# EAGLE board DAC breakout MULT (EAGLE 7.5.0)
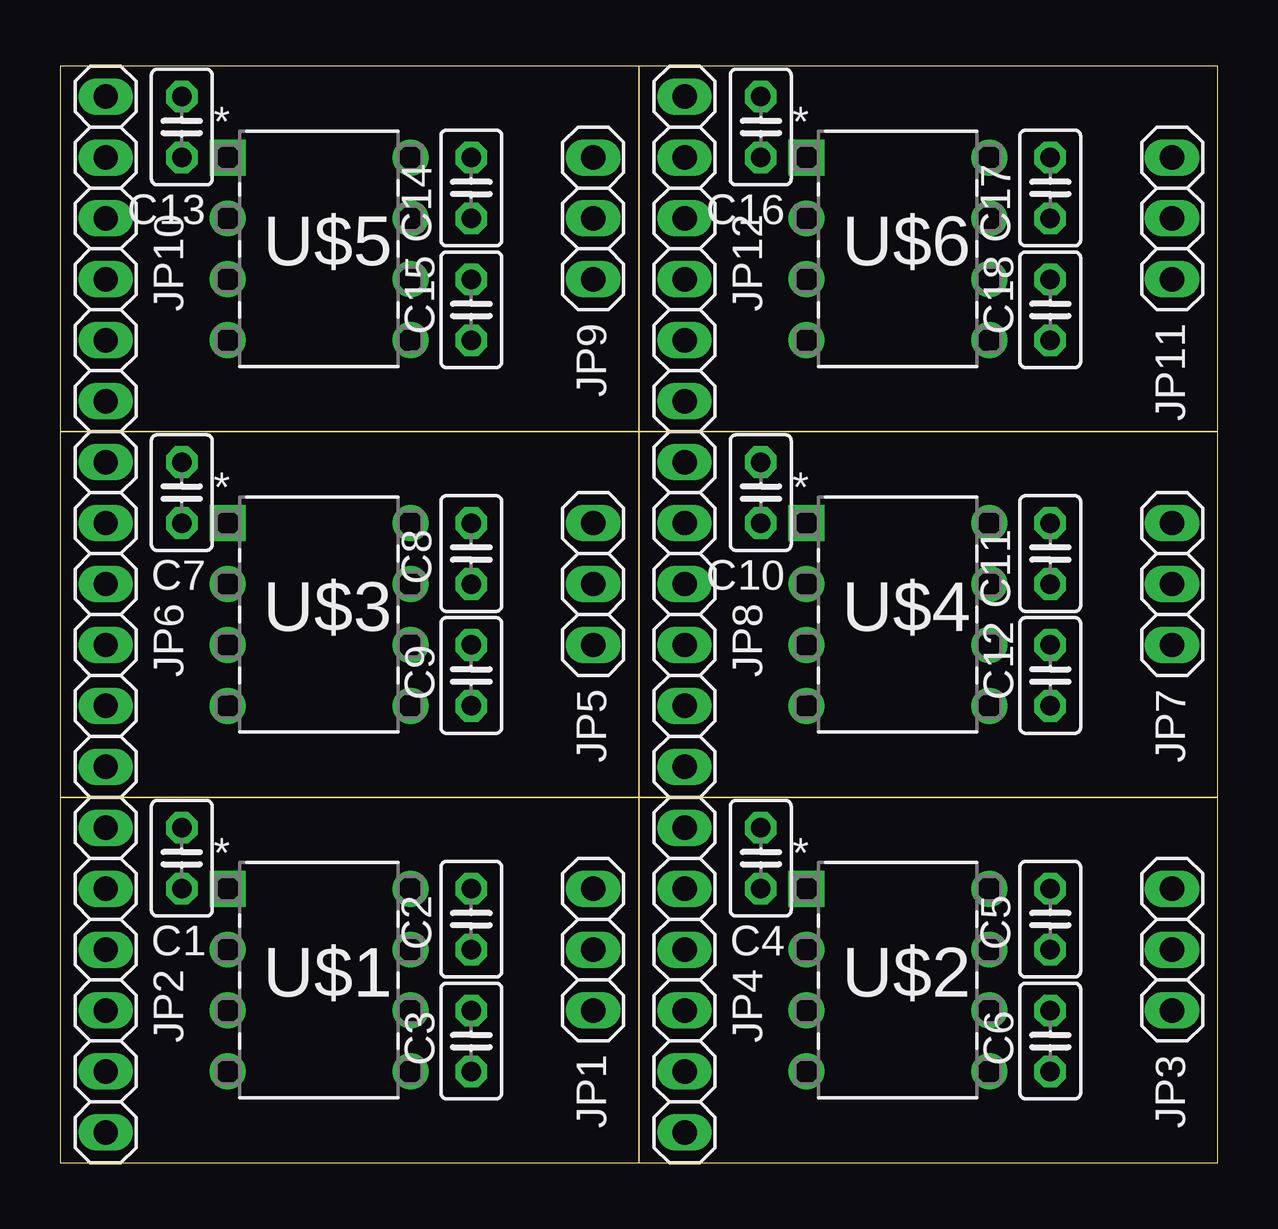
[diagram p0: board, top side]
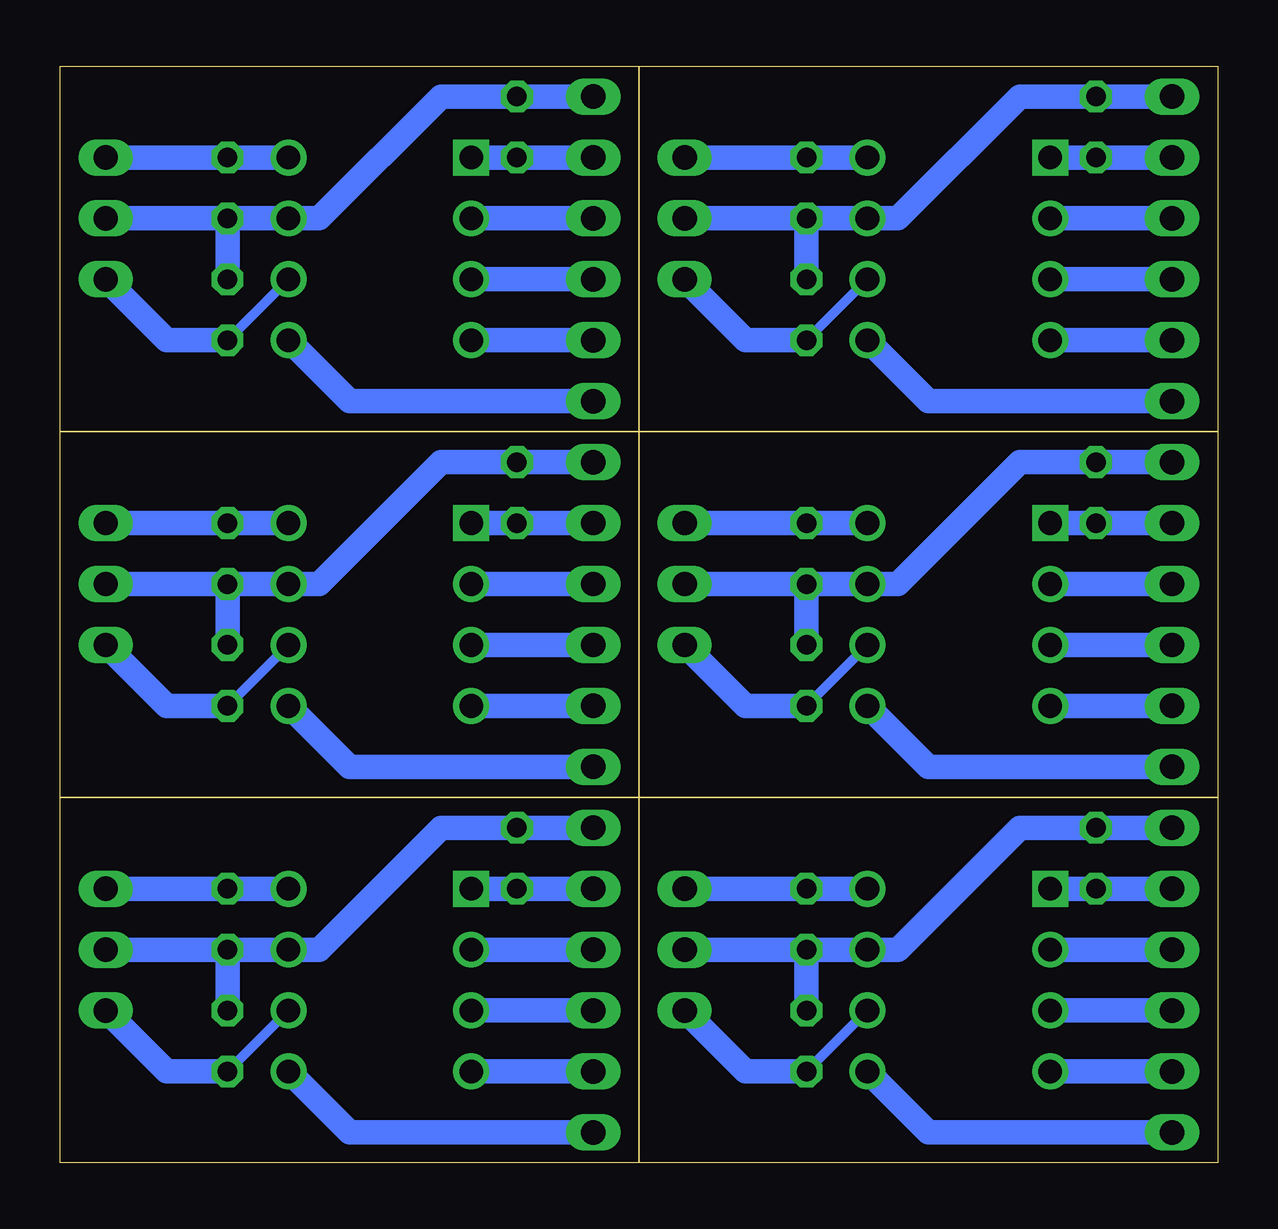
[diagram p1: board, bottom side, seen from below]

Size 48.26 x 45.72 mm. Coordinates in mm from the lower left corner, seen from the top.
Outline: 24.13,0 0,0 0,15.24
Outline: 24.13,0 24.13,15.24
Outline: 24.13,15.24 0,15.24
Outline: 24.13,0 48.26,0 48.26,15.24
Outline: 48.26,15.24 24.13,15.24
Outline: 24.13,15.24 24.13,0
Outline: 0,15.24 24.13,15.24
Outline: 24.13,15.24 24.13,30.48
Outline: 24.13,30.48 0,30.48
Outline: 0,30.48 0,15.24
Outline: 24.13,15.24 48.26,15.24
Outline: 48.26,15.24 48.26,30.48
Outline: 48.26,30.48 24.13,30.48
Outline: 24.13,30.48 24.13,15.24
Outline: 0,30.48 24.13,30.48
Outline: 24.13,30.48 24.13,45.72
Outline: 24.13,45.72 0,45.72 0,30.48
Outline: 24.13,30.48 48.26,30.48
Outline: 48.26,30.48 48.26,45.72 24.13,45.72
Outline: 24.13,45.72 24.13,30.48
Copper layers (1*16): Top 0.035mm / dielectric 1.5mm / Bottom 0.035mm
Design rules "Othermill-DRC-1-32": minimum track width 8mil, minimum drill 0.8mm, track to track 0.794003125mm, track to pad 0.794003125mm, pad to pad 0.794003125mm, via to via 0.794003125mm, smd to smd 0mil, copper to edge 0mil, drill to drill 1mil, minimum pad ring 10mil, minimum via ring 10mil, stop-mask expansion 1mil, vias tented up to drill 30mil, thermal gap 10mil

## Footprints (pad centres in the part's own frame; a part is rotated, then mirrored left to right if it is on the bottom)
C025-025X050 = drill 0.813 octagon: 1 -1.27,0; 2 1.27,0
1X03 = drill 1.016 long: 1 -2.54,0; 2 0,0; 3 2.54,0
1X06 = drill 1.016 long: 1 -6.35,0; 2 -3.81,0; 3 -1.27,0; 4 1.27,0; 5 3.81,0; 6 6.35,0
DIP254P762X432-8 = drill 0.991 square: 1 -7.62,7.62 | drill 0.991: 2 -7.62,5.08; 3 -7.62,2.54; 4 -7.62,0; 5 0,0; 6 0,2.54; 7 0,5.08; 8 0,7.62

## Placement (x,y rotation side)
C1  0.1uF  [C025-025X050]  5.08,12.7 90 top
C2  1uF  [C025-025X050]  17.14,10.16 270 top
C3  1uF  [C025-025X050]  17.14,5.08 90 top
C4  0.1uF  [C025-025X050]  29.21,12.7 90 top
C5  1uF  [C025-025X050]  41.27,10.16 270 top
C6  1uF  [C025-025X050]  41.27,5.08 90 top
C7  0.1uF  [C025-025X050]  5.08,27.94 90 top
C8  1uF  [C025-025X050]  17.14,25.4 270 top
C9  1uF  [C025-025X050]  17.14,20.32 90 top
C10  0.1uF  [C025-025X050]  29.21,27.94 90 top
C11  1uF  [C025-025X050]  41.27,25.4 270 top
C12  1uF  [C025-025X050]  41.27,20.32 90 top
C13  0.1uF  [C025-025X050]  5.08,43.18 90 top
C14  1uF  [C025-025X050]  17.14,40.64 270 top
C15  1uF  [C025-025X050]  17.14,35.56 90 top
C16  0.1uF  [C025-025X050]  29.21,43.18 90 top
C17  1uF  [C025-025X050]  41.27,40.64 270 top
C18  1uF  [C025-025X050]  41.27,35.56 90 top
JP1  [1X03]  22.22,8.89 270 top
JP2  [1X06]  1.91,7.62 90 top
JP3  [1X03]  46.36,8.89 270 top
JP4  [1X06]  26.04,7.62 90 top
JP5  [1X03]  22.22,24.13 270 top
JP6  [1X06]  1.91,22.86 90 top
JP7  [1X03]  46.36,24.13 270 top
JP8  [1X06]  26.04,22.86 90 top
JP9  [1X03]  22.22,39.37 270 top
JP10  [1X06]  1.91,38.1 90 top
JP11  [1X03]  46.36,39.37 270 top
JP12  [1X06]  26.04,38.1 90 top
U$1  MCP4822-E/P  [DIP254P762X432-8]  14.61,3.81 0 top
U$2  MCP4822-E/P  [DIP254P762X432-8]  38.73,3.81 0 top
U$3  MCP4822-E/P  [DIP254P762X432-8]  14.61,19.05 0 top
U$4  MCP4822-E/P  [DIP254P762X432-8]  38.73,19.05 0 top
U$5  MCP4822-E/P  [DIP254P762X432-8]  14.61,34.29 0 top
U$6  MCP4822-E/P  [DIP254P762X432-8]  38.73,34.29 0 top

## Library data of the parts
C1-C18 = rcl
JP1-JP12 = pinhead
U$1-U$6 = Microchip_By_element14_Batch_1; MPN: MCP4822-E/P; OC_FARNELL: 1439413; OC_NEWARK: 11M1705; PACKAGE: DIP-8; SUPPLIER: Microchip

## Nets
GND: C1.2 C2.2 C3.2 JP1.2 JP2.6 U$1.7
GND1: C4.2 C5.2 C6.2 JP3.2 JP4.6 U$2.7
GND2: C7.2 C8.2 C9.2 JP5.2 JP6.6 U$3.7
GND3: C10.2 C11.2 C12.2 JP7.2 JP8.6 U$4.7
GND4: C13.2 C14.2 C15.2 JP9.2 JP10.6 U$5.7
GND5: C16.2 C17.2 C18.2 JP11.2 JP12.6 U$6.7
N$1: C1.1 JP2.5 U$1.1
N$2: C2.1 JP1.1 U$1.8
N$3: C3.1 JP1.3 U$1.6
N$4: JP2.4 U$1.2
N$5: JP2.3 U$1.3
N$6: JP2.2 U$1.4
N$7: JP2.1 U$1.5
N$8: C4.1 JP4.5 U$2.1
N$9: JP4.4 U$2.2
N$10: JP4.3 U$2.3
N$11: JP4.2 U$2.4
N$12: JP4.1 U$2.5
N$13: C5.1 JP3.1 U$2.8
N$14: C6.1 JP3.3 U$2.6
N$15: C7.1 JP6.5 U$3.1
N$16: JP6.4 U$3.2
N$17: JP6.3 U$3.3
N$18: JP6.2 U$3.4
N$19: JP6.1 U$3.5
N$20: C8.1 JP5.1 U$3.8
N$21: C9.1 JP5.3 U$3.6
N$22: C10.1 JP8.5 U$4.1
N$23: JP8.4 U$4.2
N$24: JP8.3 U$4.3
N$25: JP8.2 U$4.4
N$26: JP8.1 U$4.5
N$27: C11.1 JP7.1 U$4.8
N$28: C12.1 JP7.3 U$4.6
N$29: C13.1 JP10.5 U$5.1
N$30: JP10.4 U$5.2
N$31: JP10.3 U$5.3
N$32: JP10.2 U$5.4
N$33: JP10.1 U$5.5
N$34: C14.1 JP9.1 U$5.8
N$35: C15.1 JP9.3 U$5.6
N$36: C16.1 JP12.5 U$6.1
N$37: JP12.4 U$6.2
N$38: JP12.3 U$6.3
N$39: JP12.2 U$6.4
N$40: JP12.1 U$6.5
N$41: C17.1 JP11.1 U$6.8
N$42: C18.1 JP11.3 U$6.6

## Tracks (layer width: path | path; a pad name or v marks a point on that pad's centre or on a via)
GND
  Bottom 1.016: JP2.6 C1.2 8.26,13.97 13.34,8.89 U$1.7 C2.2 | C2.2 C3.2 | JP1.2 C2.2
GND1
  Bottom 1.016: JP4.6 C4.2 32.39,13.97 37.47,8.89 U$2.7 C5.2 | C5.2 C6.2 | JP3.2 C5.2
GND2
  Bottom 1.016: JP6.6 C7.2 8.26,29.21 13.34,24.13 U$3.7 C8.2 | C8.2 C9.2 | JP5.2 C8.2
GND3
  Bottom 1.016: JP8.6 C10.2 32.39,29.21 37.47,24.13 U$4.7 C11.2 | C11.2 C12.2 | JP7.2 C11.2
GND4
  Bottom 1.016: JP10.6 C13.2 8.26,44.45 13.34,39.37 U$5.7 C14.2 | C14.2 C15.2 | JP9.2 C14.2
GND5
  Bottom 1.016: JP12.6 C16.2 32.39,44.45 37.47,39.37 U$6.7 C17.2 | C17.2 C18.2 | JP11.2 C17.2
N$1
  Bottom 1.016: JP2.5 C1.1 U$1.1
N$2
  Bottom 1.016: U$1.8 C2.1 JP1.1
N$3
  Bottom 0.406: C3.1 U$1.6
  Bottom 1.016: JP1.3 19.68,3.81 C3.1
N$4
  Bottom 1.016: JP2.4 U$1.2
N$5
  Bottom 1.016: JP2.3 U$1.3
N$6
  Bottom 1.016: JP2.2 U$1.4
N$7
  Bottom 1.016: JP2.1 12.06,1.27 U$1.5
N$8
  Bottom 1.016: JP4.5 C4.1 U$2.1
N$9
  Bottom 1.016: JP4.4 U$2.2
N$10
  Bottom 1.016: JP4.3 U$2.3
N$11
  Bottom 1.016: JP4.2 U$2.4
N$12
  Bottom 1.016: JP4.1 36.2,1.27 U$2.5
N$13
  Bottom 1.016: U$2.8 C5.1 JP3.1
N$14
  Bottom 0.406: C6.1 U$2.6
  Bottom 1.016: JP3.3 43.82,3.81 C6.1
N$15
  Bottom 1.016: JP6.5 C7.1 U$3.1
N$16
  Bottom 1.016: JP6.4 U$3.2
N$17
  Bottom 1.016: JP6.3 U$3.3
N$18
  Bottom 1.016: JP6.2 U$3.4
N$19
  Bottom 1.016: JP6.1 12.06,16.51 U$3.5
N$20
  Bottom 1.016: U$3.8 C8.1 JP5.1
N$21
  Bottom 0.406: C9.1 U$3.6
  Bottom 1.016: JP5.3 19.68,19.05 C9.1
N$22
  Bottom 1.016: JP8.5 C10.1 U$4.1
N$23
  Bottom 1.016: JP8.4 U$4.2
N$24
  Bottom 1.016: JP8.3 U$4.3
N$25
  Bottom 1.016: JP8.2 U$4.4
N$26
  Bottom 1.016: JP8.1 36.2,16.51 U$4.5
N$27
  Bottom 1.016: U$4.8 C11.1 JP7.1
N$28
  Bottom 0.406: C12.1 U$4.6
  Bottom 1.016: JP7.3 43.82,19.05 C12.1
N$29
  Bottom 1.016: JP10.5 C13.1 U$5.1
N$30
  Bottom 1.016: JP10.4 U$5.2
N$31
  Bottom 1.016: JP10.3 U$5.3
N$32
  Bottom 1.016: JP10.2 U$5.4
N$33
  Bottom 1.016: JP10.1 12.06,31.75 U$5.5
N$34
  Bottom 1.016: U$5.8 C14.1 JP9.1
N$35
  Bottom 0.406: C15.1 U$5.6
  Bottom 1.016: JP9.3 19.68,34.29 C15.1
N$36
  Bottom 1.016: JP12.5 C16.1 U$6.1
N$37
  Bottom 1.016: JP12.4 U$6.2
N$38
  Bottom 1.016: JP12.3 U$6.3
N$39
  Bottom 1.016: JP12.2 U$6.4
N$40
  Bottom 1.016: JP12.1 36.2,31.75 U$6.5
N$41
  Bottom 1.016: U$6.8 C17.1 JP11.1
N$42
  Bottom 0.406: C18.1 U$6.6
  Bottom 1.016: JP11.3 43.82,34.29 C18.1